# Altium PCB Inverter.PcbDoc
Units mm, origin at the board's own origin, x right, y up, seen from the top; angles counter-clockwise.
Board outline 114.17 x 82.3 mm, 2 copper layers (Top Layer, Bottom Layer); 77 components, 33 nets, 175 pads, 36 vias.
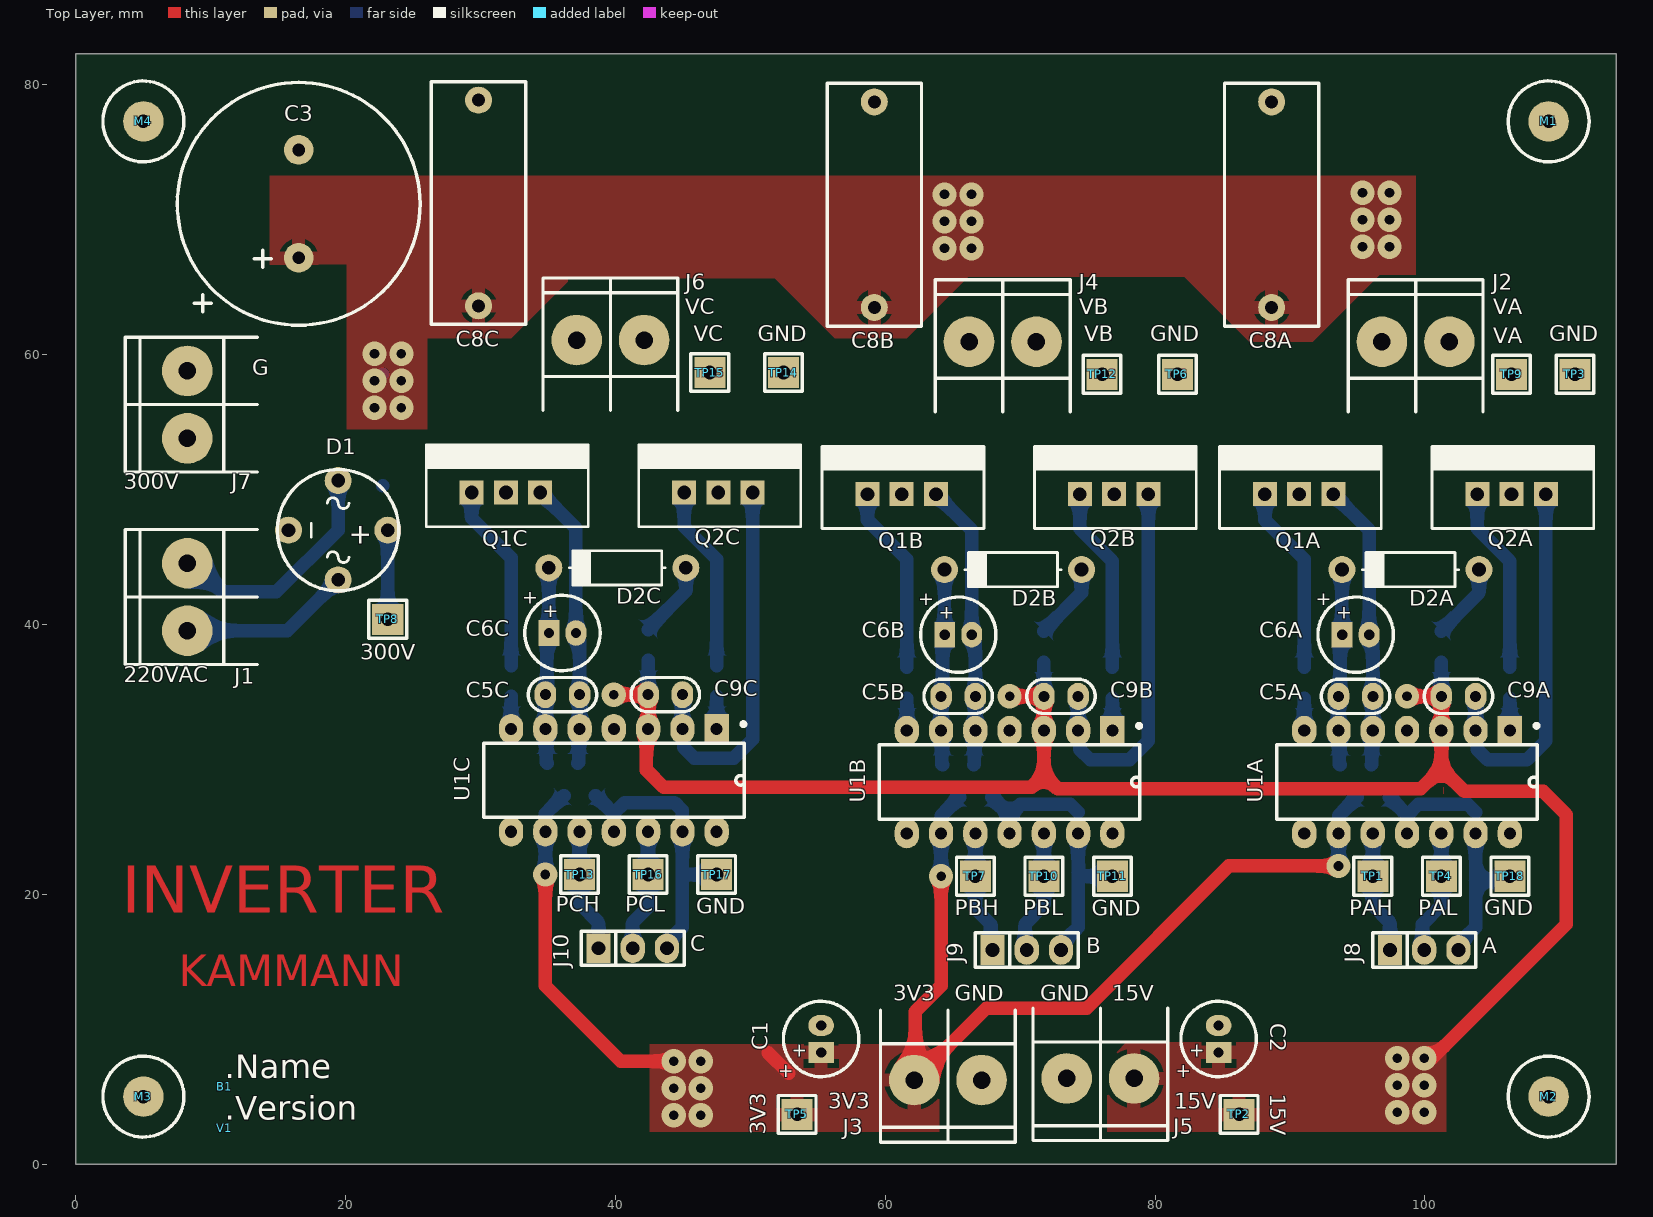
[diagram p0: Top Layer view]
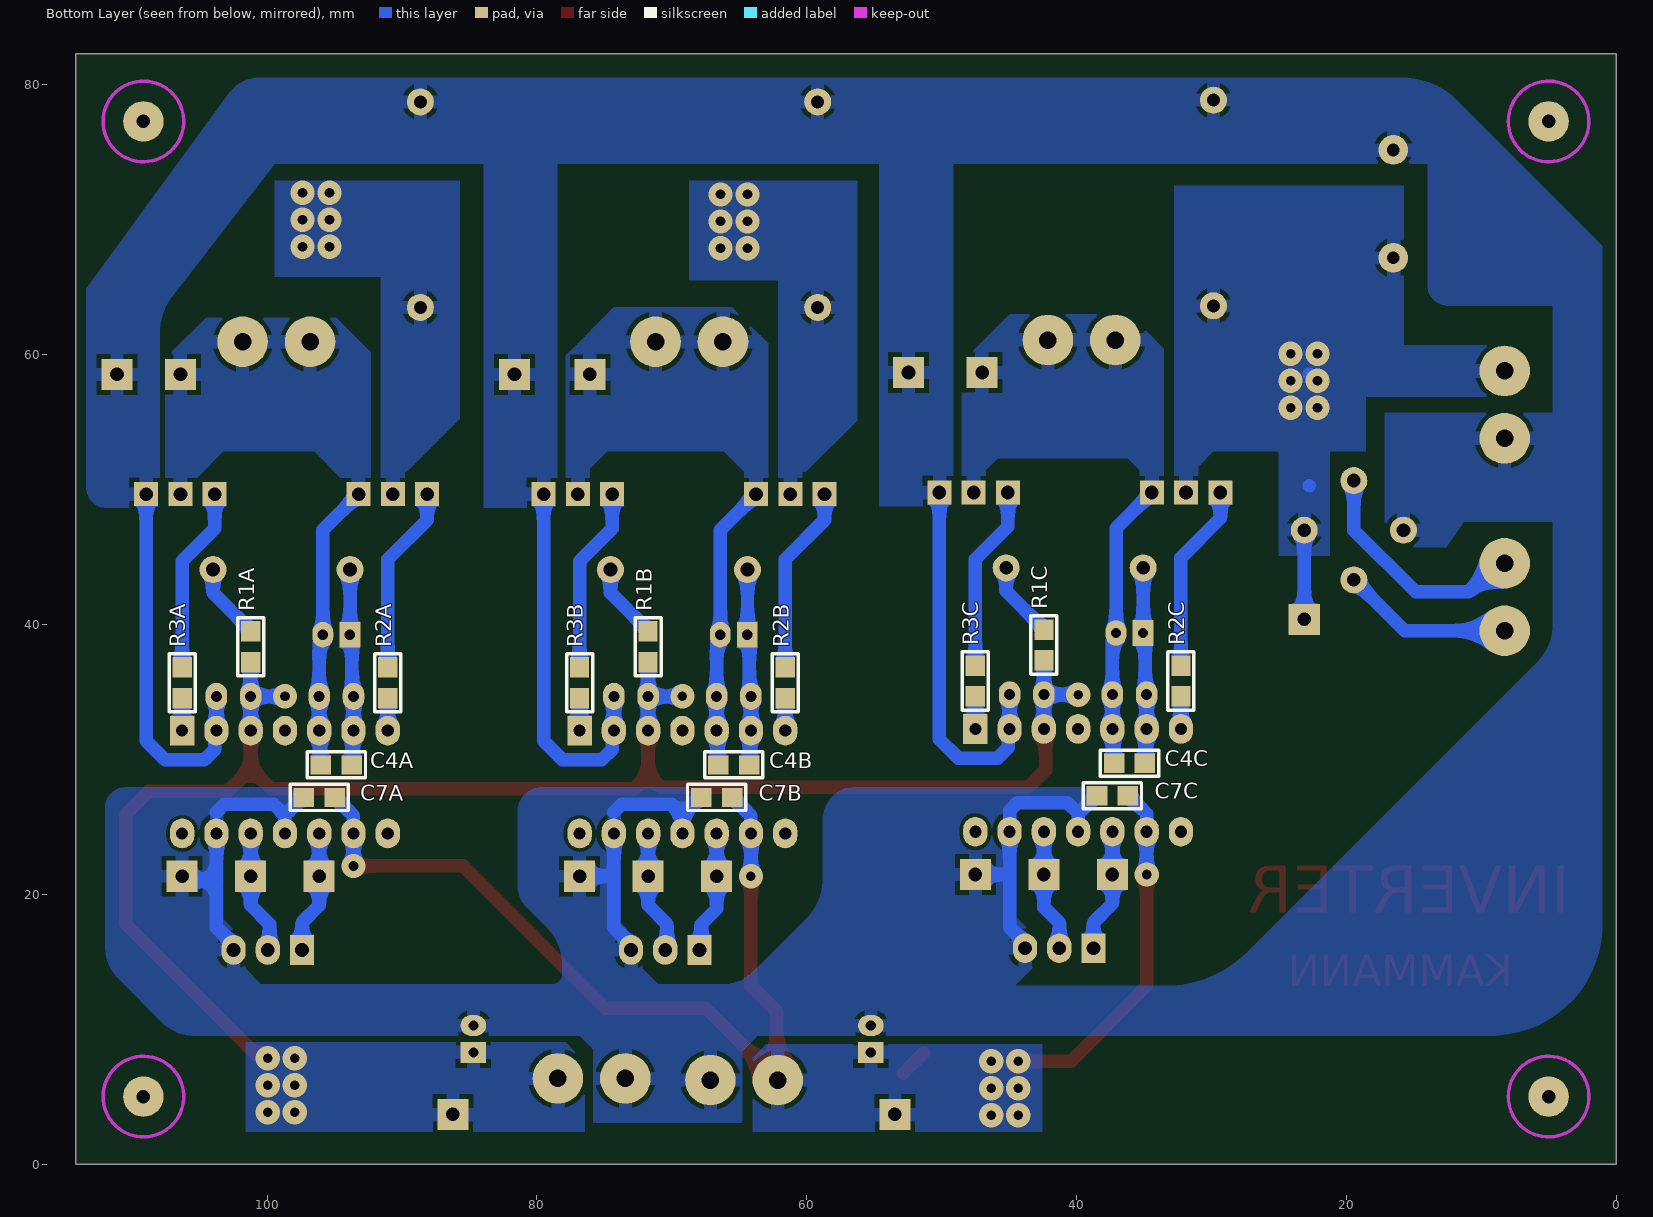
[diagram p1: Bottom Layer view, seen from below]
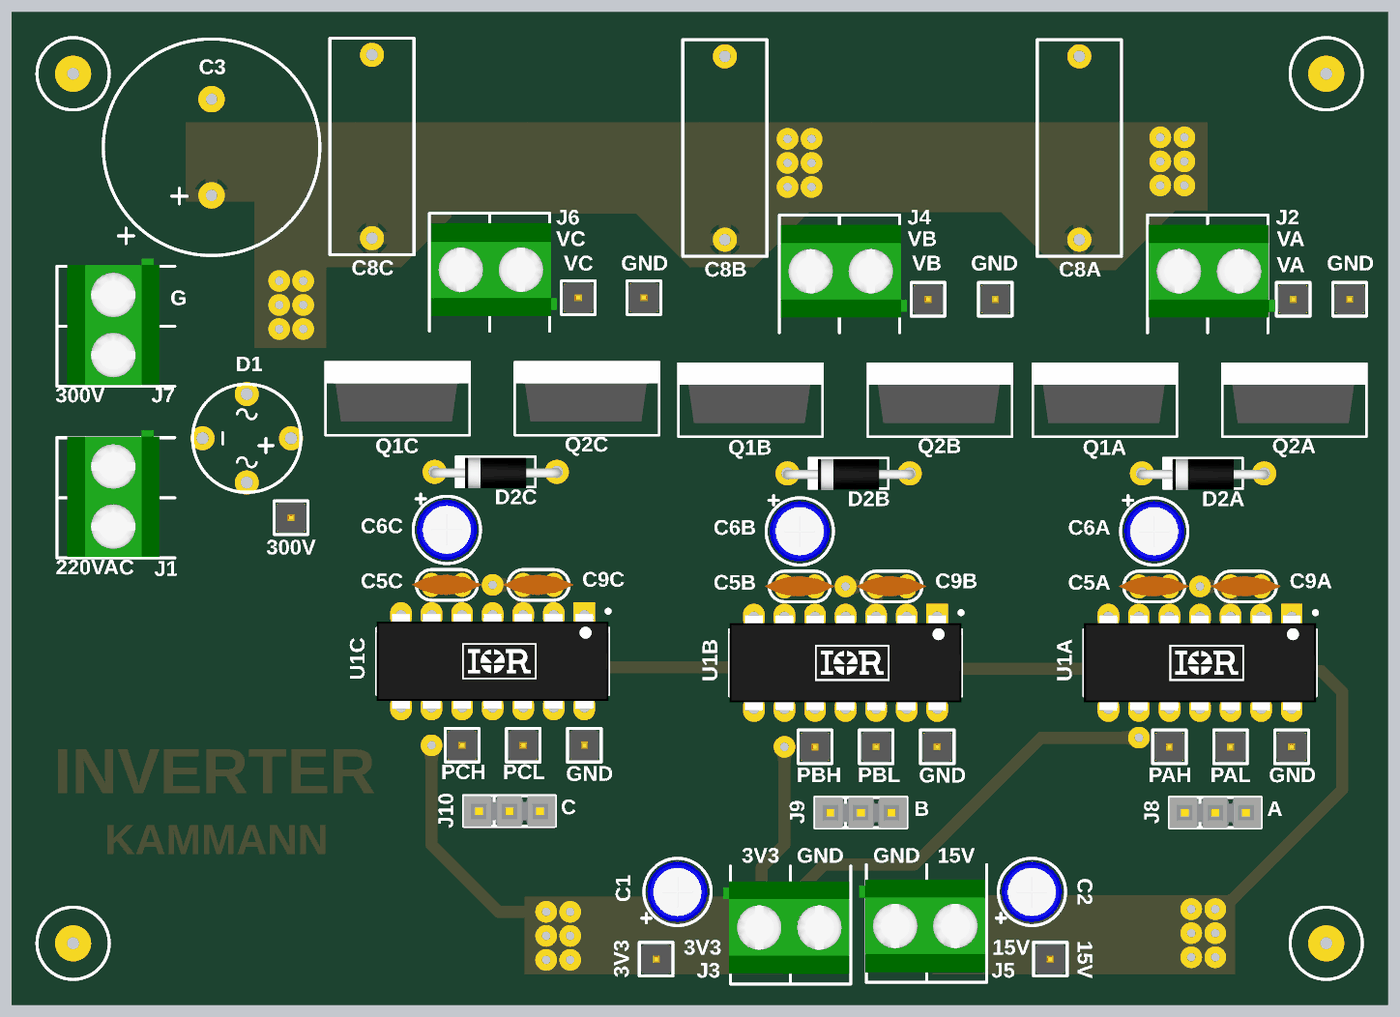
[diagram p2: 3D render of the assembled board from above, using the file's embedded part models]
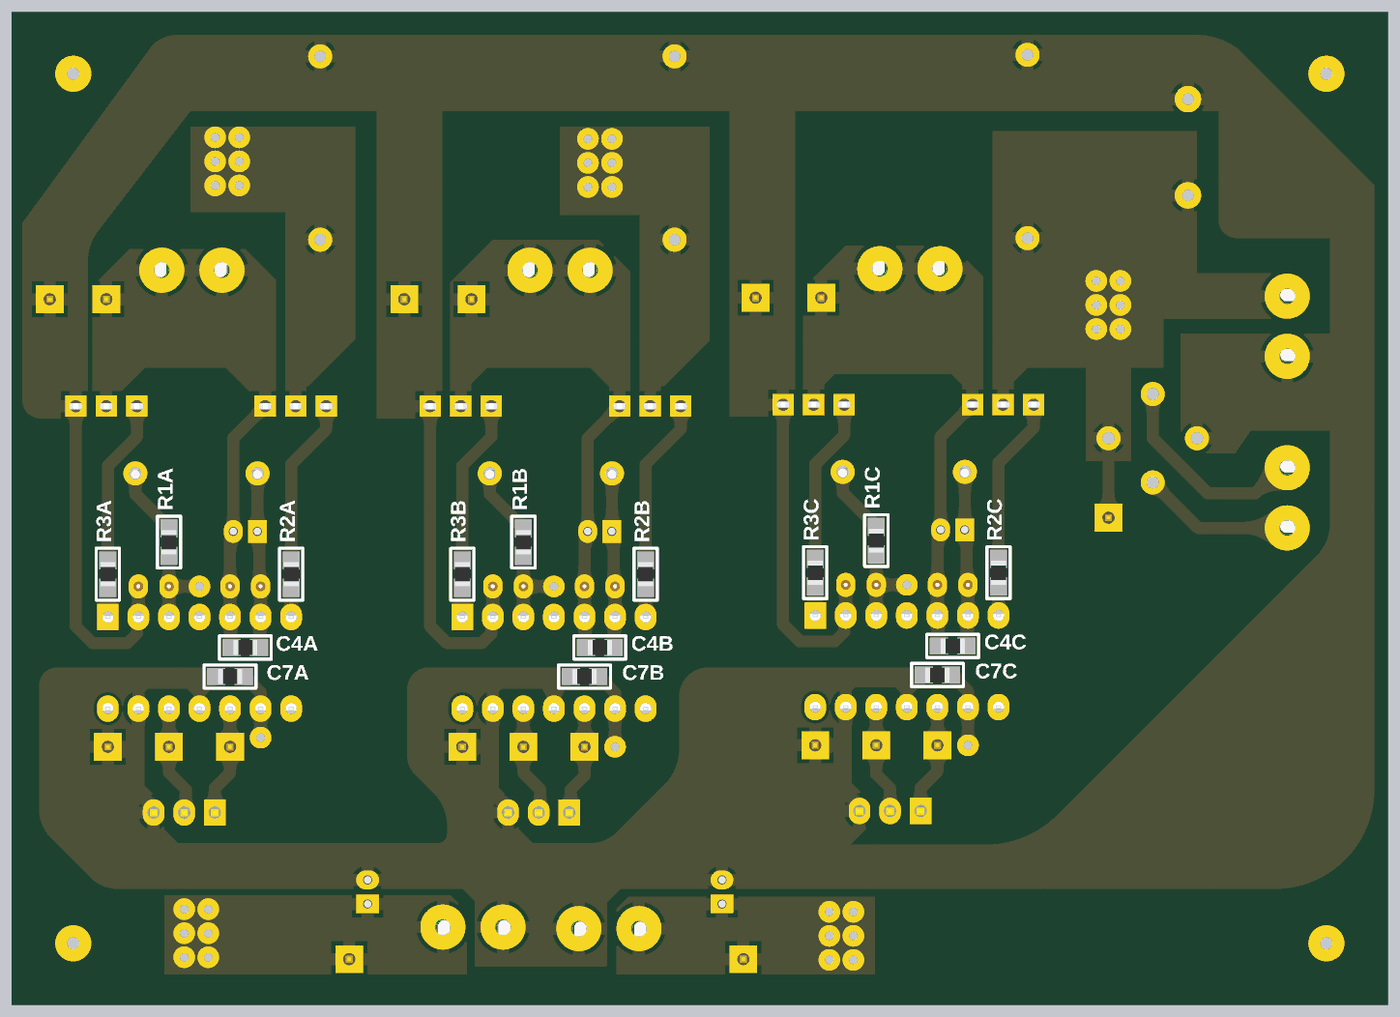
[diagram p3: 3D render of the assembled board from below, using the file's embedded part models]

## Layer stack, top to bottom
Top Solder: solder mask 0.0102, Solder Resist, Dk 3.5
Top Layer: signal copper 0.0356
Dielectric 1: dielectric 0.32, FR-4, Dk 4.8
Bottom Layer: signal copper 0.0356
Bottom Solder: solder mask 0.0102, Solder Resist, Dk 3.5

## Board outline
0,0 0,82.296 114.173,82.296 114.173,0

## Design rules (kind name [scope] priority, off if disabled: settings)
Clearance 300V_Clearance [InNet('300V')] p1: gap=0.762 ignorepadtopadclearanceinfootprint=FALSE
Clearance [All] p2: gap=0.254 ignorepadtopadclearanceinfootprint=FALSE
MinimumSolderMaskSliver [All] p1: minsoldermaskwidth=0
PlaneConnect [All] p1: planeconnectstyle=Relief reliefexpansion=0.508 reliefentries=4 reliefconductorwidth=1 reliefairgap=0.3
PolygonConnect ViaPolygonConnect [IsVia] p1: connectstyle=Direct reliefconductorwidth=0.254 reliefentries=4 polygonreliefangle="90 Angle" airgapwidth=0.254
PolygonConnect [All] p2: connectstyle=Relief reliefconductorwidth=1 reliefentries=4 polygonreliefangle="90 Angle" airgapwidth=0.35
RoomDefinition A [InComponentClass('A')] p1: confinementstyle=ConfineIn formatcopy=TRUE lockcomponents=FALSE outline 84.328,23.241 112.903,23.241 112.903,80.518 84.328,80.518
RoomDefinition Inverter [InComponentClass('Inverter')] p2: confinementstyle=ConfineIn formatcopy=TRUE lockcomponents=FALSE outline 1.524,1.143 113.03,1.143 113.03,80.772 1.524,80.772
RoomDefinition C [InComponentClass('C')] p3: confinementstyle=ConfineIn formatcopy=FALSE lockcomponents=FALSE outline 25.527,23.368 54.102,23.368 54.102,80.645 25.527,80.645
RoomDefinition B [InComponentClass('B')] p4: confinementstyle=ConfineIn formatcopy=TRUE lockcomponents=FALSE outline 54.864,23.241 83.439,23.241 83.439,80.518 54.864,80.518
RoutingVias [All] p1: holewidth=0.711 width=1.27 viastyle="Through Hole" minholewidth=0.711 minwidth=1.27 maxholewidth=0.711 maxwidth=1.27
SilkToSilkClearance [All] p1: silktosilkclearance=0.2
SilkToSolderMaskClearance [IsPad] p1: minsilkscreentomaskgap=0 clearancetoexposedcopper=TRUE
SolderMaskExpansion [All] p1: expansion=0 istentingtop=FALSE
Width [All] p1: maxlimit=2 minlimit=0.3 preferedwidth=1
26 further rules are at their usual default settings.

## Classes and differential pairs
channel class PhaseDriver: A B C
component class C: C4C C5C C6C C7C C8C C9C D2C Q1C Q2C R1C R2C R3C U1C
component class B: C4B C5B C6B C7B C8B C9B D2B Q1B Q2B R1B R2B R3B U1B
component class A: C4A C5A C6A C7A C8A C9A D2A Q1A Q2A R1A R2A R3A U1A
component class Inverter: B1 C1 C2 C3 D1 J1 J2 J3 J4 J5 J6 J7 J8 J9 J10 M1 M2 M3 M4 TP1 TP2 TP3 TP4 TP5 TP6 TP7 TP8 TP9 TP10 TP11 TP12 TP13 TP14 TP15 TP16 TP17 TP18 V1

## Components (designator, comment, footprint, x,y, rotation, side; value= is the part's Value field where it differs from the comment)
B1 "Board Name" MISC_BOARD 11.049,5.715 r0 top
C1 "CAPPOL" CAP100RP 55.245,9.271 r90 top value=10μF
C2 "CAPPOL" CAP100RP 84.709,9.271 r90 top value=10μF
C3 "CAPPOL" CAP_8mm 16.51,71.184 r90 top value=68μF
C4A "CAP" 0805 94.869,29.591 r0 bottom value=0.1μF (schematic designator C4)
C4B "CAP" 0805 65.405,29.591 r0 bottom value=0.1μF (schematic designator C4)
C4C "CAP" 0805 36.068,29.718 r0 bottom value=0.1μF (schematic designator C4)
C5A "CAP" CAP100 94.869,34.671 r0 top value=1μF (schematic designator C5)
C5B "CAP" CAP100 65.405,34.671 r0 top value=1μF (schematic designator C5)
C5C "CAP" CAP100 36.068,34.798 r0 top value=1μF (schematic designator C5)
C6A "CAPPOL" CAP100RP 94.871,39.243 r0 top value=10μF (schematic designator C6)
C6B "CAPPOL" CAP100RP 65.407,39.243 r0 top value=10μF (schematic designator C6)
C6C "CAPPOL" CAP100RP 36.07,39.37 r0 top value=10μF (schematic designator C6)
C7A "CAP" 0805 96.139,27.178 r0 bottom value=0.1μF (schematic designator C7)
C7B "CAP" 0805 66.675,27.178 r0 bottom value=0.1μF (schematic designator C7)
C7C "CAP" 0805 37.338,27.305 r0 bottom value=0.1μF (schematic designator C7)
C8A "CAP" CAP600 88.646,71.12 r90 top value=0.47μF (schematic designator C8)
C8B "CAP" CAP600 59.182,71.12 r90 top value=0.47μF (schematic designator C8)
C8C "CAP" CAP600 29.845,71.247 r90 top value=0.47μF (schematic designator C8)
C9A "CAP" CAP100 102.489,34.671 r0 top value=1μF (schematic designator C9)
C9B "CAP" CAP100 73.025,34.671 r0 top value=1μF (schematic designator C9)
C9C "CAP" CAP100 43.688,34.798 r0 top value=1μF (schematic designator C9)
D1 "W10M" "PUENTE - W10M" 23.114,46.99 r270 top
D2A "MUR160" DO41 98.933,44.069 r180 top (schematic designator D2)
D2B "MUR160" DO41 69.469,44.069 r180 top (schematic designator D2)
D2C "MUR160" DO41 40.132,44.196 r180 top (schematic designator D2)
J1 "220VAC" BORNERA2 8.255,42.037 r0 top
J2 "VA" BORNERA2 99.314,60.96 r270 top
J3 "3V3" BORNERA2 64.643,6.223 r90 top
J4 "VB" BORNERA2 68.707,60.96 r270 top
J5 "15V" BORNERA2 75.946,6.35 r90 top
J6 "VC" BORNERA2 39.624,61.087 r270 top
J7 "300V" BORNERA2 8.255,56.301 r0 top
J8 "A" SIP3 99.949,15.875 r0 top
J9 "B" SIP3 70.485,15.875 r0 top
J10 "C" SIP3 41.275,16.002 r0 top
M1 "Mounting Hole" MISC_MOUNTING_HOLE_M3 109.173,77.296 r0 top
M2 "Mounting Hole" MISC_MOUNTING_HOLE_M3 109.173,5 r0 top
M3 "Mounting Hole" MISC_MOUNTING_HOLE_M3 5,5 r0 top
M4 "Mounting Hole" MISC_MOUNTING_HOLE_M3 5,77.296 r0 top
Q1A "IRF840" "TO-220 V" 90.678,49.657 r0 top (schematic designator Q1)
Q1B "IRF840" "TO-220 V" 61.214,49.657 r0 top (schematic designator Q1)
Q1C "IRF840" "TO-220 V" 31.877,49.784 r0 top (schematic designator Q1)
Q2A "IRF840" "TO-220 V" 106.426,49.657 r0 top (schematic designator Q2)
Q2B "IRF840" "TO-220 V" 76.962,49.657 r0 top (schematic designator Q2)
Q2C "IRF840" "TO-220 V" 47.625,49.784 r0 top (schematic designator Q2)
R1A "RES" 0805 101.219,38.354 r90 bottom value=10Ω (schematic designator R1)
R1B "RES" 0805 71.755,38.354 r90 bottom value=10Ω (schematic designator R1)
R1C "RES" 0805 42.418,38.481 r90 bottom value=10Ω (schematic designator R1)
R2A "RES" 0805 91.059,35.687 r270 bottom value=22Ω (schematic designator R2)
R2B "RES" 0805 61.595,35.687 r270 bottom value=22Ω (schematic designator R2)
R2C "RES" 0805 32.258,35.814 r270 bottom value=22Ω (schematic designator R2)
R3A "RES" 0805 106.299,35.687 r270 bottom value=22Ω (schematic designator R3)
R3B "RES" 0805 76.835,35.687 r270 bottom value=22Ω (schematic designator R3)
R3C "RES" 0805 47.498,35.814 r270 bottom value=22Ω (schematic designator R3)
TP1 "PAH" TPTH 96.139,21.336 r0 top
TP2 "15V" TPTH 86.233,3.683 r270 top
TP3 "GND" TPTH 111.125,58.547 r90 top
TP4 "PAL" TPTH 101.219,21.336 r0 top
TP5 "3V3" TPTH 53.467,3.683 r90 top
TP6 "GND" TPTH 81.661,58.547 r180 top
TP7 "PBH" TPTH 66.675,21.336 r0 top
TP8 "300V" TPTH 23.114,40.386 r90 top
TP9 "VA" TPTH 106.426,58.547 r0 top
TP10 "PBL" TPTH 71.755,21.336 r90 top
TP11 "GND" TPTH 76.835,21.336 r90 top
TP12 "VB" TPTH 76.073,58.547 r0 top
TP13 "PCH" TPTH 37.338,21.463 r270 top
TP14 "GND" TPTH 52.451,58.674 r90 top
TP15 "VC" TPTH 46.99,58.674 r90 top
TP16 "PCL" TPTH 42.418,21.463 r90 top
TP17 "GND" TPTH 47.498,21.463 r0 top
TP18 "GND" TPTH 106.299,21.336 r90 top
U1A "IR2110" IR2110 98.679,28.321 r270 top (schematic designator U1)
U1B "IR2110" IR2110 69.215,28.321 r270 top (schematic designator U1)
U1C "IR2110" IR2110 39.878,28.448 r270 top locked (schematic designator U1)
V1 "PCB Version" MISC_VERSION 11.049,2.667 r0 top

## Footprints (in the part's own frame and the unit in brackets; to place one, negate y for a bottom-side part, rotate by r counter-clockwise, add the part's x,y. Pads: shape width x height; smd on the part's side, far side on the other; paste and mask are expansions set on the pad)
0805 [mil] "Pasivo 0805"
  rect 60x56 smd: 1(-45,0) 2(45,0)
  silkscreen extent -85,-38 85,38, body extent -40,-24 39,25, height 15
BORNERA2 [mm] "Bornera con Tornillos 5mm separación"
  round 3.75 hole 1.3: 1(0,2.5) 2(0,-2.5)
  silkscreen extent -4.6,-5 5.2,5, body extent -3.76,-4.89 3.94,5.61, height 10
CAP100 [mm]
  oval 1.6x2 hole 0.813: 1(-1.27,0) 2(1.27,0)
  silkscreen extent -2.54,-1.27 2.54,1.27, body extent -2.92,-0.84 2.92,0.86, height 6.12
CAP100RP [mm] "Body diameter 5mm"
  rect 1.55x1.9 hole 0.762: 1(-1,0)
  oval 1.55x1.9 hole 0.762: 2(1,0)
  silkscreen extent -2.79,-2.79 2.79,2.79, body extent -2.53,-2.51 2.53,2.54, height 11.53
CAP600 [mm]
  round 2 hole 0.965: 1(-7.62,0) 2(7.62,0)
  silkscreen extent -9,-3.5 9,3.5
CAP_8mm [mm]
  round 2.2 hole 0.95: 1(-4,0) 2(4,0)
  silkscreen extent -9,-9 9,9
DO41 [mm]
  round 2 hole 1.016: 1(-5.08,0) 2(5.08,0)
  silkscreen extent -3.56,-1.27 3.56,1.27, body extent -5.46,-1.19 5.46,1.37, height 2.03
IR2110 [mm] "DIP,7.62mm lead span,2.54mm pitch;14 pin,6.605mm W X 19.305mm L X 5.33mm H body"
  rect 2.2x1.8 hole 0.9 paste+0 mask+0: 1(-3.81,7.62)
  oval 2.2x1.8 hole 0.9 paste+0 mask+0: 2(-3.81,5.08) 3(-3.81,2.54) 4(-3.81,0) 5(-3.81,-2.54) 6(-3.81,-5.08) 7(-3.81,-7.62) 8(3.81,-7.62) 9(3.81,-5.08) 10(3.81,-2.54) 11(3.81,0) 12(3.81,2.54) 13(3.81,5.08) 14(3.81,7.62)
  silkscreen extent -4.27,-9.65 2.75,9.7, body extent -3.96,-9.65 3.96,9.65, height 5.33
MISC_BOARD [mm]
MISC_MOUNTING_HOLE_M3 [mm]
  round 3 hole 1 unplated: 1(0,0)
  Bottom Layer keep-out circle w0.254: c0,0 r2.989
  silkscreen extent -3,-3 3,3
MISC_VERSION [mm]
"PUENTE - W10M" [mm]
  round 2 hole 1.016: 1(0,0) 2(-3.677,-3.677) 3(0,-7.354) 4(3.677,-3.677)
  silkscreen extent -4.5,-8.17 4.5,0.82
SIP3 [mm]
  rect 1.8x2.2 hole 1.016: 1(-2.54,0)
  oval 1.8x2.2 hole 1.016: 2(0,0) 3(2.54,0)
  silkscreen extent -3.81,-1.27 3.81,1.27, body extent -3.81,-1.3 3.81,1.24, height 8.38
"TO-220 V" [mil]
  rect 70x70 hole 40: 1(-100,0) 2(0,0) 3(100,0)
  silkscreen extent -232,-100 240,139, body extent -205,-56 205,120, height 760
TPTH [mm]
  rect 2.3x2.3 hole 1.016: 1(0,0)
  silkscreen extent -1.4,-1.4 1.4,1.4, body extent -1.27,-1.27 1.27,1.27, height 6.04

## Part data
B1: library part MISC_BOARD, Name="3-Phase Inverter"
C1 C2 C6A C6B C6C: library part "CAPACITOR POLARIZADO", "CAPACITOR POLARIZADO", Manufacturer=-, Voltage Rating=50V, Manufacturer Part Number=-
C3: library part "CAPACITOR POLARIZADO", "CAPACITOR POLARIZADO", Manufacturer=-, Voltage Rating=450V, Manufacturer Part Number=-
C4A C4B C4C C5A C5B C5C C7A C7B C7C C9A C9B C9C: library part CAPACITOR, "CAPACITOR", Manufacturer=-, Voltage Rating=25V, Manufacturer Part Number=-
C8A C8B C8C: library part CAPACITOR, "CAPACITOR", Manufacturer=-, Voltage Rating=400V, Manufacturer Part Number=-
J1 J2 J3 J4 J5 J6 J7: library part "BORNERA 2", "BORNERA 2 POLOS", Manufacturer=-, Manufacturer Part Number=-
J8 J9 J10: library part CON3
M1 M2 M3 M4: library part MISC_MOUNTING_HOLE_M3, "MOUNTING HOLE M2.5"
Q1A Q1B Q1C Q2A Q2B Q2C: Manufacturer=Vishay, Manufacturer Part Number=IRF840
R1A R1B R1C R2A R2B R2C R3A R3B R3C: library part RESISTOR, "RESISTOR", Manufacturer=-, Power=1/10W, Manufacturer Part Number=-
TP1 TP2 TP3 TP4 TP5 TP6 TP7 TP8 TP9 TP10 TP11 TP12 TP13 TP14 TP15 TP16 TP17 TP18: library part TP, "TESTPOINT"
U1A U1B U1C: "High and Low Side Driver", Manufacturer="Infineon Technologies", Manufacturer Order Number=IR2110, PackageReference=PG-DIP-14-903
V1: library part MISC_VERSION, Version=0.0
D2A D2B D2C: Manufacturer Part Number=MUR160

## Via types
v1: diameter 1.8, hole 0.711, Top Layer to Bottom Layer, 36 vias

## Nets (pads, with @x,y where several pads share a name; then routed paths per layer and width w, separated by ;. In a path a pad name is that pad's centre, name@x,y a point inside that pad or via, vN(x,y) a via of type N, cw(c..) or ccw(c..) an arc to the next point about the centre after c; other vN are vias at no path point)
3V3: C1.1 C7A.1 C7B.1 C7C.1 J3.1 TP5.1 U1A.9 U1B.9 U1C.9 | length 95.1
  Top Layer w1: v1(34.798,21.463) 34.798,13.208 40.386,7.62 v1@44.7,7.62 ; 51.308,8.255 52.832,6.731 ; J3.1 J3.1@62.23,6.31 ; v1(64.135,21.336) 64.135,13.208 62.23,11.303 J3.1@62.23,6.31 ; v1(93.599,22.098) 85.471,22.098 74.93,11.557 67.477,11.557 J3.1@62.23,6.31
  Bottom Layer w1: v1(34.798,21.463) U1C.9 34.798,25.959 36.144,27.305 C7C.1 ; v1(64.135,21.336) U1B.9 64.135,25.832 65.481,27.178 C7B.1 ; v1(93.599,22.098) U1A.9 93.599,25.832 94.945,27.178 C7A.1
  other v1: 44.323,3.62 46.323,3.62 44.323,5.62 46.323,5.62 44.323,7.62 46.323,7.62
15V: C2.1 C9A.1 C9B.1 C9C.1 J5.2 R1A.1 R1B.1 R1C.1 TP2.1 U1A.3 U1B.3 U1C.3 | length 141
  Top Layer w1: v1(39.878,34.798) C9C.1 U1C.3 42.418,31.886 42.291,31.759 42.291,29.21 43.561,27.94 70.866,27.94 71.755,28.829 ; v1(69.215,34.671) C9B.1 U1B.3 71.755,28.829 ; v1(98.679,34.671) C9A.1 U1A.3 101.219,29.337 ; v1@100.584,7.874 110.49,17.78 110.49,25.908 108.776,27.622 102.933,27.622 101.219,29.337 ; 71.755,28.829 72.771,27.813 99.695,27.813 101.219,29.337
  Bottom Layer w1: v1(39.878,34.798) C9C.1 ; U1C.3 C9C.1 ; R1C.1 C9C.1 ; v1(69.215,34.671) C9B.1 ; U1B.3 C9B.1 ; R1B.1 C9B.1 ; v1(98.679,34.671) C9A.1 ; U1A.3 C9A.1 ; R1A.1 C9A.1
  other v1: 97.949,3.842 99.949,3.842 97.949,5.842 99.949,5.842 97.949,7.842 99.949,7.842
220V_F: D1.2 J1.1 | length 17.6
  Bottom Layer w1: J1.1 8.79,44.537 10.909,42.418 14.859,42.418 19.437,46.996 D1.2
220V_N: D1.4 J1.2 | length 12.7
  Bottom Layer w1: J1.2 15.661,39.537 D1.4
300V: C3.1 C8A.1 C8B.1 C8C.1 D1.1 J7.1 Q1A.2 Q1B.2 Q1C.2 TP8.1 | length 6.6
  Bottom Layer w1: v1@22.727,58.547 v1@22.73,58.544 ; 22.73,50.295 22.733,50.292 ; TP8.1 D1.1
  other v1: 22.13,56.071 24.13,56.071 22.13,58.071 24.13,58.071 22.13,60.071 24.13,60.071 64.389,67.882 66.389,67.882 95.377,68.009 97.377,68.009 64.389,69.882 66.389,69.882 95.377,70.009 97.377,70.009 64.389,71.882 66.389,71.882 95.377,72.009 97.377,72.009
GND: C1.2 C2.2 C3.2 C7A.2 C7B.2 C7C.2 C8A.2 C8B.2 C8C.2 C9A.2 C9B.2 C9C.2 D1.3 J3.2 J5.1 J7.2 J8.3 J9.3 J10.3 Q2A.3 Q2B.3 Q2C.3 TP3.1 TP6.1 TP11.1 TP14.1 TP17.1 TP18.1 U1A.2 U1A.11 U1A.13 U1B.2 U1B.11 U1B.13 U1C.2 U1C.11 U1C.13 | length 148.5
  Bottom Layer w1: C7C.2 38.532,27.305 39.878,25.959 ; U1C.11 39.878,25.995 40.68,26.797 44.372,26.797 44.958,26.211 44.958,21.463 44.958,21.1 ; J10.3 43.815,16.418 44.958,17.561 44.958,21.1 ; C9C.2 U1C.2 45.065,32.151 45.065,30.881 45.847,30.099 48.768,30.099 50.165,31.496 Q2C.3 ; TP17.1 45.321,21.463 44.958,21.1 ; C7B.2@67.905,27.178 69.215,25.868 ; U1B.11 69.215,25.868 ; J9.3 73.025,16.291 74.295,17.561 74.295,21.59 ; U1B.13 74.295,21.59 ; 74.295,26.084 73.709,26.67 70.017,26.67 69.215,25.868 ; C9B.2 U1B.2 74.402,32.024 74.402,30.754 75.184,29.972 78.105,29.972 79.502,31.369 Q2B.3 ; TP11.1 74.549,21.336 74.295,21.59 ; C7A.2@97.369,27.178 98.697,25.85 ; U1A.11 98.679,25.868 ; 98.679,25.832 99.517,26.67 103.173,26.67 103.759,26.084 ; J8.3 102.489,16.291 103.759,17.561 103.759,21.036 ; U1A.13 103.759,21.036 ; C9A.2 U1A.2 103.866,32.024 103.866,30.754 104.648,29.972 107.569,29.972 108.966,31.369 Q2A.3 ; TP18.1 105.999,21.036 103.759,21.036
NetC4A_1: C4A.1 C5A.1 C6A.1 D2A.2 U1A.6 | length 14.6
  Bottom Layer w1: C4A.1 93.662,29.654 93.662,32.067 U1A.6 C5A.1 93.714,34.786 93.714,39.086 C6A.1 ; C6A.1@93.853,39.261 D2A.2
NetC4B_1: C4B.1 C5B.1 C6B.1 D2B.2 U1B.6 | length 14.6
  Bottom Layer w1: C4B.1 64.198,29.654 64.198,32.067 U1B.6 C5B.1 64.25,34.786 64.25,39.086 C6B.1 ; C6B.1@64.389,39.261 D2B.2
NetC4C_1: C4C.1 C5C.1 C6C.1 D2C.2 U1C.6 | length 14.6
  Bottom Layer w1: C4C.1 34.861,29.781 34.861,32.194 U1C.6 C5C.1 34.913,34.913 34.913,39.213 C6C.1 ; C6C.1@35.052,39.388 D2C.2
NetD2A_1: D2A.1 R1A.2 | length 5.7
  Bottom Layer w1: R1A.2 101.43,39.708 101.43,39.759 104.013,42.342 D2A.1
NetD2B_1: D2B.1 R1B.2 | length 5.7
  Bottom Layer w1: R1B.2 71.966,39.708 71.966,39.759 74.549,42.342 D2B.1
NetD2C_1: D2C.1 R1C.2 | length 5.7
  Bottom Layer w1: R1C.2 42.629,39.835 42.629,39.886 45.212,42.469 D2C.1
NetQ1A_1: Q1A.1 R2A.1 | length 14
  Bottom Layer w1: Q1A.1 88.138,47.752 91.059,44.831 R2A.1
NetQ1B_1: Q1B.1 R2B.1 | length 14
  Bottom Layer w1: Q1B.1 58.674,47.752 61.595,44.831 R2B.1
NetQ1C_1: Q1C.1 R2C.1 | length 14
  Bottom Layer w1: Q1C.1 29.337,47.879 32.258,44.958 R2C.1
NetQ2A_1: Q2A.1 R3A.1 | length 13.8
  Bottom Layer w1: Q2A.1 103.886,47.117 106.299,44.704 R3A.1
NetQ2B_1: Q2B.1 R3B.1 | length 13.8
  Bottom Layer w1: Q2B.1 74.422,47.117 76.835,44.704 R3B.1
NetQ2C_1: Q2C.1 R3C.1 | length 13.8
  Bottom Layer w1: Q2C.1 45.085,47.244 47.498,44.831 R3C.1
NetR2A_2: R2A.2 U1A.7 | length 2.4
  Bottom Layer w1: U1A.7 R2A.2
NetR2B_2: R2B.2 U1B.7 | length 2.4
  Bottom Layer w1: U1B.7 R2B.2
NetR2C_2: R2C.2 U1C.7 | length 2.4
  Bottom Layer w1: U1C.7 R2C.2
NetR3A_2: R3A.2 U1A.1 | length 2.4
  Bottom Layer w1: U1A.1 R3A.2
NetR3B_2: R3B.2 U1B.1 | length 2.4
  Bottom Layer w1: U1B.1 R3B.2
NetR3C_2: R3C.2 U1C.1 | length 2.4
  Bottom Layer w1: U1C.1 R3C.2
PAH: J8.1 TP1.1 U1A.10 | length 9.2
  Bottom Layer w1: U1A.10 TP1.1 96.139,19.177 97.409,17.907 J8.1
PAL: J8.2 TP4.1 U1A.12 | length 9.3
  Bottom Layer w1: J8.2 99.822,16.002 99.822,17.78 101.219,19.177 TP4.1 U1A.12
PBH: J9.1 TP7.1 U1B.10 | length 9.2
  Bottom Layer w1: U1B.10 TP7.1 66.675,18.923 67.818,17.78 67.818,16.002 J9.1
PBL: J9.2 TP10.1 U1B.12 | length 9.3
  Bottom Layer w1: J9.2 70.358,16.002 70.358,17.78 71.755,19.177 TP10.1 U1B.12
PCH: J10.1 TP13.1 U1C.10 | length 9.2
  Bottom Layer w1: U1C.10 TP13.1 37.338,19.304 38.735,17.907 J10.1
PCL: J10.2 TP16.1 U1C.12 | length 9.1
  Bottom Layer w1: J10.2 41.275,17.907 42.418,19.05 TP16.1 U1C.12
VA: C4A.2 C5A.2 C6A.2 J2.1 J2.2 Q1A.3 Q2A.2 TP9.1 U1A.5 | length 21.3
  Bottom Layer w1: Q1A.3 95.871,47.004 C6A.2 95.871,38.919 96.139,38.651 C5A.2 U1A.5 96.075,32.067 96.075,29.654 C4A.2
VB: C4B.2 C5B.2 C6B.2 J4.1 J4.2 Q1B.3 Q2B.2 TP12.1 U1B.5 | length 21.3
  Bottom Layer w1: Q1B.3 66.407,47.004 C6B.2 66.407,38.919 66.675,38.651 C5B.2 U1B.5 66.611,32.067 66.611,29.654 C4B.2
VC: C4C.2 C5C.2 C6C.2 J6.1 J6.2 Q1C.3 Q2C.2 TP15.1 U1C.5 | length 21.3
  Bottom Layer w1: Q1C.3 37.07,47.131 C6C.2 37.07,39.046 37.338,38.778 C5C.2 U1C.5 37.274,32.194 37.274,29.781 C4C.2
pads on no net: M1.1 M2.1 M3.1 M4.1 U1A.4 U1A.8 U1A.14 U1B.4 U1B.8 U1B.14 U1C.4 U1C.8 U1C.14

## Polygon pours and split planes (outlines as drawn)
GND on Bottom Layer "GND_L02_P055" (solid, remove dead copper, pour order 55): 17.145,55.688 4.699,55.688 4.699,64.897 1.016,64.897 1.016,17.78 ccw(c9.271,17.78) 9.271,9.525 48.26,9.525 48.26,13.208 33.345,13.208 cw(c33.345,21.657) 27.37,15.683 5.82,37.233 cw(c8.527,39.94) 4.699,39.94 4.699,47.625 11.279,47.625 12.589,45.72 15.875,45.72 17.145,46.99
GND on Bottom Layer "GND_L02_P054" (solid, remove dead copper, pour order 54): 75.819,3.048 64.897,3.048 64.77,3.175 64.77,8.382 63.627,9.525 48.26,9.525 42.926,14.859 42.926,16.764 44.45,18.288 44.45,26.543 38.608,26.543 38.481,26.67 38.481,27.94 56.388,27.94 cw(c56.388,25.527) 58.801,25.527 58.801,21.176 ccw(c63.014,21.176) 60.035,18.197 63.977,14.255 ccw(c66.198,16.475) 66.198,13.335 70.993,13.335 72.136,14.478 72.136,16.256 73.787,17.907 73.787,26.543 67.818,26.543 67.818,27.94 79.629,27.94 cw(c79.629,26.162) 81.407,26.162 81.407,20.563 cw(c79.288,20.563) 80.786,19.064 79.242,17.52 ccw(c81.986,14.776) 78.105,14.776 78.105,14.097 ccw(c78.867,14.097) 78.867,13.335 100.457,13.335 101.6,14.478 101.6,16.51 103.251,18.161 103.251,26.543 97.282,26.543 97.282,27.94 110.49,27.94 cw(c110.49,26.416) 112.014,26.416 112.014,16.16 cw(c108.567,16.16) 111.004,13.722 107.764,10.482 cw(c105.454,12.792) 105.454,9.525 76.835,9.525 75.819,8.509
300V on Bottom Layer "300V_L02_P059" (solid, remove dead copper, pour order 59): 15.748,72.517 15.748,56.896 18.542,56.896 18.542,52.832 21.209,52.832 21.209,45.085 25.019,45.085 25.019,52.832 29.845,52.832 30.988,51.689 30.988,48.895 32.766,48.895 32.766,72.517
300V on Bottom Layer "300V_L02_P057" (solid, remove dead copper, pour order 57): 62.103,48.768 62.103,72.898 56.261,72.898 56.261,55.118 60.325,51.054 60.325,48.768
300V on Bottom Layer "300V_L02_P056" (solid, remove dead copper, pour order 56): 91.567,48.768 91.567,72.898 85.725,72.898 85.725,55.245 89.789,51.181 89.789,48.768
VA on Bottom Layer "VA_L02_P051" (solid, remove dead copper, pour order 51): 92.329,48.768 92.329,60.198 94.869,62.738 104.521,62.738 107.569,59.69 107.569,50.8 107.188,50.419 105.664,50.419 103.251,52.832 96.52,52.832 94.107,50.419 94.107,49.657
VB on Bottom Layer "VB_L02_P049" (solid, remove dead copper, pour order 49): 62.865,48.895 62.865,60.833 65.532,63.5 74.295,63.5 77.851,59.944 77.851,48.895 76.2,48.895 76.073,48.768 76.073,51.562 74.803,52.832 66.167,52.832 64.643,51.308 64.643,48.895
GND on Bottom Layer "GND_L02_P047" (solid, remove dead copper, pour order 47): 107.95,48.641 107.95,61.746 ccw(c103.916,61.746) 107.112,64.207 99.441,74.168 99.441,80.518 100.603,80.518 cw(c100.603,77.801) 102.795,79.406 113.411,64.897 113.411,50.165 cw(c111.887,50.165) 111.887,48.641
GND on Bottom Layer "GND_L02_P046" (solid, remove dead copper, pour order 46): 78.486,48.641 78.486,80.391 83.947,80.391 83.947,48.641
GND on Bottom Layer "GND_L02_P045" (solid, remove dead copper, pour order 45): 49.149,48.768 49.149,80.518 54.61,80.518 54.61,48.768
GND on Bottom Layer "GND_L02_P043" (solid, remove dead copper, pour order 43): 1.016,63.627 1.016,68.072 11.855,78.911 cw(c15.735,75.03) 15.735,80.518 99.441,80.518 99.441,74.168 13.97,74.168 13.97,65.151 cw(c12.446,65.151) 12.446,63.627
VC on Bottom Layer "VC_L02_P038" (solid, remove dead copper, pour order 38): 33.528,48.895 33.528,60.452 36.068,62.992 44.958,62.992 48.514,59.436 48.514,48.895 46.736,48.895 46.736,51.435 45.847,52.324 36.195,52.324 35.306,51.435 35.306,48.895
300V on Bottom Layer "300V_L02_P073" (solid, remove dead copper, pour order 73): 6.096,60.706 6.096,56.896 21.717,56.896 21.717,60.706
300V on Bottom Layer "300V_L02_P071" (solid, pour order 71): 86.995,72.898 99.441,72.898 99.441,65.786 87.122,65.786 86.995,65.913
300V on Bottom Layer "300V_L02_P070" (solid, pour order 70): 56.261,72.898 68.707,72.898 68.707,65.532 56.388,65.532 56.261,65.659
15V on Bottom Layer "15V_L02_P066" (solid, remove dead copper, pour order 66): 76.454,7.62 77.851,9.017 101.6,9.017 101.6,2.413 76.454,2.413
3V3 on Bottom Layer "3V3_L02_P065" (solid, remove dead copper, pour order 65): 64.008,2.413 42.545,2.413 42.545,8.89 62.992,8.89 64.008,7.874
300V on Top Layer "300V_L01_P061" (solid, remove dead copper, pour order 61): 14.351,73.279 99.314,73.279 99.314,65.913 96.647,65.913 91.694,60.96 86.995,60.96 82.169,65.786 66.167,65.786 61.595,61.214 56.261,61.214 51.816,65.659 36.449,65.659 36.449,65.405 32.258,61.214 26.035,61.214 26.035,54.483 20.066,54.483 20.066,66.675 14.351,66.675
15V on Top Layer "15V_L01_P064" (solid, remove dead copper, pour order 64): 76.454,7.62 77.851,9.017 101.6,9.017 101.6,2.413 76.454,2.413
3V3 on Top Layer "3V3_L01_P063" (solid, remove dead copper, pour order 63): 64.008,2.413 42.545,2.413 42.545,8.89 62.992,8.89 64.008,7.874

## Other copper
Top Layer:
  text "INVERTER" at 3.397,17.494 h6
  text "KAMMANN" at 7.605,12.414 h4

## Silkscreen, mask and mechanical layers (free items; w line width, h text height)
Top Overlay:
  text "G" at 13.081,58.062 h2
  text "3V3" at 60.579,11.707 h2
  text "GND" at 65.151,11.699 h2
  text "GND" at 71.501,11.707 h2
  text "15V" at 76.835,11.707 h2
Board Shape:
  the board outline again, w0.254

## Text inside footprints (layer, text, board x,y; h text height)
C1: Top Overlay "+" at 54.077,7.823 h1.02 r90; Top Overlay "+" at 53.061,6.299 h1.02 r90
C2: Top Overlay "+" at 83.541,7.823 h1.02 r90; Top Overlay "+" at 82.525,6.299 h1.02 r90
C6A: Top Overlay "+" at 91.899,41.427 h1.02; Top Overlay "+" at 93.423,40.411 h1.02
C6B: Top Overlay "+" at 62.435,41.427 h1.02; Top Overlay "+" at 63.959,40.411 h1.02
C6C: Top Overlay "+" at 34.622,40.538 h1.02; Top Overlay "+" at 33.098,41.554 h1.02
D1: Top Overlay "+" at 20.437,47.49 h1.52 r270